# EAGLE board K1FM-GPS-Breakout-Board (EAGLE 9.4.1)
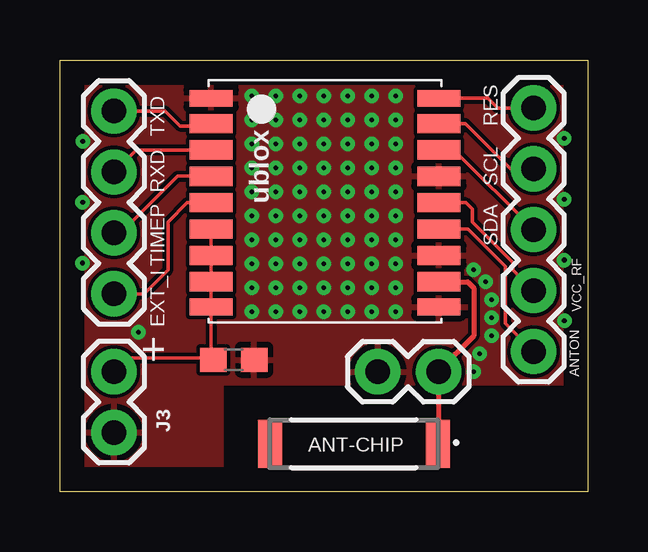
[diagram p0: board, top side]
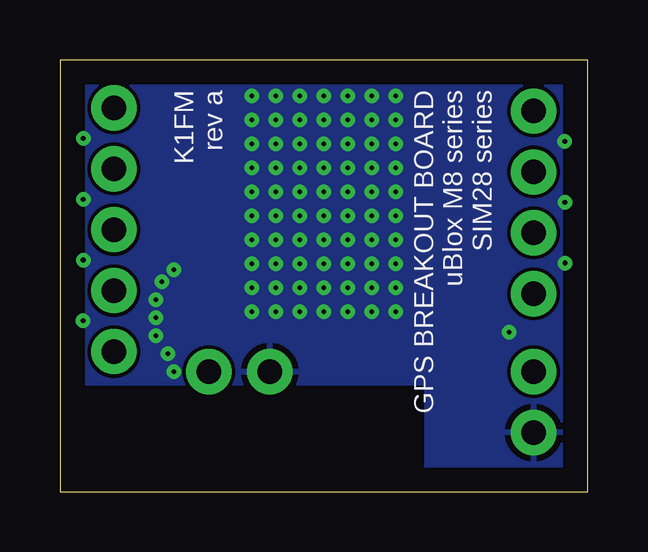
[diagram p1: board, bottom side, seen from below]

Size 22 x 18 mm. Coordinates in mm from the lower left corner, seen from the top.
Outline: 0,18 22,18 22,0 0,0 0,18
Copper layers (1+2*15+16): Top 0.035mm / dielectric 0.15mm / Route2 0.035mm / dielectric 0.15mm / Route15 0.035mm / dielectric 0.2mm / Bottom 0.035mm
Design rules "default *": minimum track width 6mil, minimum drill 0.1mm, track to track 6mil, track to pad 6mil, pad to pad 6mil, via to via 6mil, smd to smd 6mil, copper to edge 40mil, drill to drill 6mil, minimum pad ring 10mil, minimum via ring 8mil, stop-mask expansion 4mil, vias tented up to drill 0mil, thermal gap 10mil
Net classes: 1 vcc: width 0.254 mm

## Footprints (pad centres in the part's own frame; a part is rotated, then mirrored left to right if it is on the bottom)
1575AT43A0040E = smd 1 x 2: 1 3.5,0; 2 -3.5,0
0603 = smd 1.1 x 1: 1 -0.85,0; 2 0.85,0
UBLOX_MAX = smd 1.8 x 0.7: 1_GND 4.95,-4.4; 9_V_RESET 4.95,4.3; 10_GND -4.55,4.3; 18_RESERVED -4.55,-4.4 | smd 1.8 x 0.8: 2_TXD1 4.95,-3.35; 3_RXD1 4.95,-2.25; 4_TIMEPULSE 4.95,-1.15; 5_EXTINT0 4.95,-0.05; 6_V_BCKP 4.95,1.05; 7_VCC_IO 4.95,2.15; 8_VCC 4.95,3.25; 11_RF_IN -4.55,3.25; 12_GND -4.55,2.15; 13_ANTON -4.55,1.05; 14_VCC_RF -4.55,-0.05; 15_RESERVED -4.55,-1.15; 16_SDA2 -4.55,-2.25; 17_SCL2 -4.55,-3.35
1X02 = drill 1.016 pad 1.88: 1 0,0; 2 2.54,0
1X05 = drill 1.016 pad 1.88: 1 0,0; 2 2.54,0; 3 5.08,0; 4 7.62,0; 5 10.16,0
1X04 = drill 1.016 pad 1.88: 1 0,0; 2 2.54,0; 3 5.08,0; 4 7.62,0

## Placement (x,y rotation side)
ANT-CHIP  ANT1  [1575AT43A0040E]  12.25,2 0 top
C10  0.47uF  [0603]  7.25,5.5 0 top
GPS1  UBLOX_MAX  [UBLOX_MAX]  11.25,12 180 top
GPS-ANT  GPS ANT  [1X02]  13.25,5 0 top
J1  [1X05]  19.75,16 270 top
J2  [1X04]  2.25,8.25 90 top
J3  POWER  [1X02]  2.25,5 270 top

## Library data of the parts
ANT-CHIP = samacsys_parts; DESCRIPTION: Tri-Band GPS, BDS, and GLNSS, Low Cost, Linearly Polarized, Omnidirectional Chip Antenna; HEIGHT: mm; MANUFACTURER_NAME: JOHANSON TECHNOLOGY; MANUFACTURER_PART_NUMBER: 1575AT43A0040E; MOUSER_PART_NUMBER: 609-1575AT43A0040E; MOUSER_PRICE-STOCK: https://www.mouser.com/Search/Refine.aspx?Keyword=609-1575AT43A0040E
C10 = SparkFun-Capacitors; PROD_ID: CAP-08604
GPS1 = Ava
GPS-ANT J1 J3 = SparkFun-Connectors
J2 = SparkFun-Connectors; PROD_ID: CONN-09696

## Nets
3V: C10.1 GPS1.6_V_BCKP GPS1.7_VCC_IO GPS1.8_VCC GPS1.9_V_RESET J3.1
GND: C10.2 GPS1.1_GND GPS1.10_GND GPS1.12_GND GPS1.15_RESERVED GPS-ANT.1 J3.2
N$1: GPS1.4_TIMEPULSE J2.2
N$2: GPS1.3_RXD1 J2.3
N$3: GPS1.2_TXD1 J2.4
N$5: GPS1.5_EXTINT0 J2.1
N$6: ANT-CHIP.1 GPS1.11_RF_IN GPS-ANT.2
N$7: GPS1.18_RESERVED J1.1
N$8: GPS1.17_SCL2 J1.2
N$9: GPS1.16_SDA2 J1.3
N$10: GPS1.13_ANTON J1.5
N$11: GPS1.14_VCC_RF J1.4

## Tracks (layer width: path | path; a pad name or v marks a point on that pad's centre or on a via)
3V
  Top 0.152: GPS1.6_V_BCKP GPS1.7_VCC_IO GPS1.8_VCC GPS1.9_V_RESET 6.3,5.6 6.33,5.58 | 6.33,5.58 C10.1 | J3.1 2.83,5.58 6.33,5.58
GND  (via drill 0.2)
  other vias: 14,16.5 13,16.5 12,16.5 11,16.5 10,16.5 9,16.5 8,16.5 14,15.5 13,15.5 12,15.5 11,15.5 10,15.5 9,15.5 8,15.5 14,14.5 13,14.5 12,14.5 11,14.5 10,14.5 9,14.5 8,14.5 14,13.5 13,13.5 12,13.5 11,13.5 10,13.5 9,13.5 8,13.5 14,12.5 13,12.5 12,12.5 11,12.5 10,12.5 9,12.5 8,12.5 14,11.5 13,11.5 12,11.5 11,11.5 10,11.5 9,11.5 8,11.5 8,10.5 9,10.5 10,10.5 11,10.5 12,10.5 13,10.5 14,10.5 14,9.5 13,9.5 12,9.5 11,9.5 10,9.5 9,9.5 8,9.5 8,8.5 9,8.5 10,8.5 11,8.5 12,8.5 13,8.5 14,8.5 14,7.5 13,7.5 12,7.5 11,7.5 10,7.5 9,7.5 8,7.5 3.27,6.64 17.25,9.25 17.75,8.75 18,8 18,7.25 18,6.5 17.5,5.75 17.25,5 0.94,9.53 0.94,12.07 0.95,14.61 21.03,14.73 21.03,12.19 21.03,9.65 21.04,7.12
  pour Top: 0,18 22,18 22,4.5 6.75,4.5 6.75,0 0,0
  pour Bottom: 0.25,0 0.25,18 21.75,18 21.75,4.5 6.75,4.5 6.75,0
N$1
  Top 0.152: J2.2 2.54,10.79 4.9,13.15 GPS1.4_TIMEPULSE
N$2
  Top 0.152: J2.3 3.17,14.25 GPS1.3_RXD1
N$3
  Top 0.152: J2.4 4.38,15.87 5,15.25 6.2,15.25 GPS1.2_TXD1
N$5
  Top 0.152: J2.1 3.5,8.25 4.5,9.25 4.5,11.25 5.3,12.05 GPS1.5_EXTINT0
N$6
  Top 0.152: 15.79,2.04 ANT-CHIP.1
  Top 0.203: GPS1.11_RF_IN 17,8.75 17.25,8.5 17.25,6.5 15.79,5.04 GPS-ANT.2 15.79,2.04
N$7
  Top 0.152: GPS1.18_RESERVED 17.85,16.4 18.25,16 J1.1
N$8
  Top 0.152: GPS1.17_SCL2 16.9,15.35 18.79,13.46 J1.2
N$9
  Top 0.152: GPS1.16_SDA2 16.42,14.25 J1.3
N$10
  Top 0.152: GPS1.13_ANTON 17.02,10.95 18.58,9.39 18.58,7.01 J1.5
N$11
  Top 0.152: J1.4 18.89,9.24 18.89,9.55 17.19,11.24 17.19,11.77 16.92,12.05 GPS1.14_VCC_RF

## Text on the board
tPlace: TXD | RES | RXD | SCL | TIMEP | SDA | EXT_I | + | ANTON | VCC_RF
bPlace: GPS BREAKOUT BOARD / uBlox M8 series / SIM28 series | K1FM / rev a